# Altium PCB Slave_CA.PcbDoc
Units mil, origin at the board's own origin, x right, y up, seen from the top; angles counter-clockwise.
Board outline 2480.03 x 2575.03 mil, 2 copper layers (Top Layer, Bottom Layer); 31 components, 19 nets, 108 pads, 3 vias.
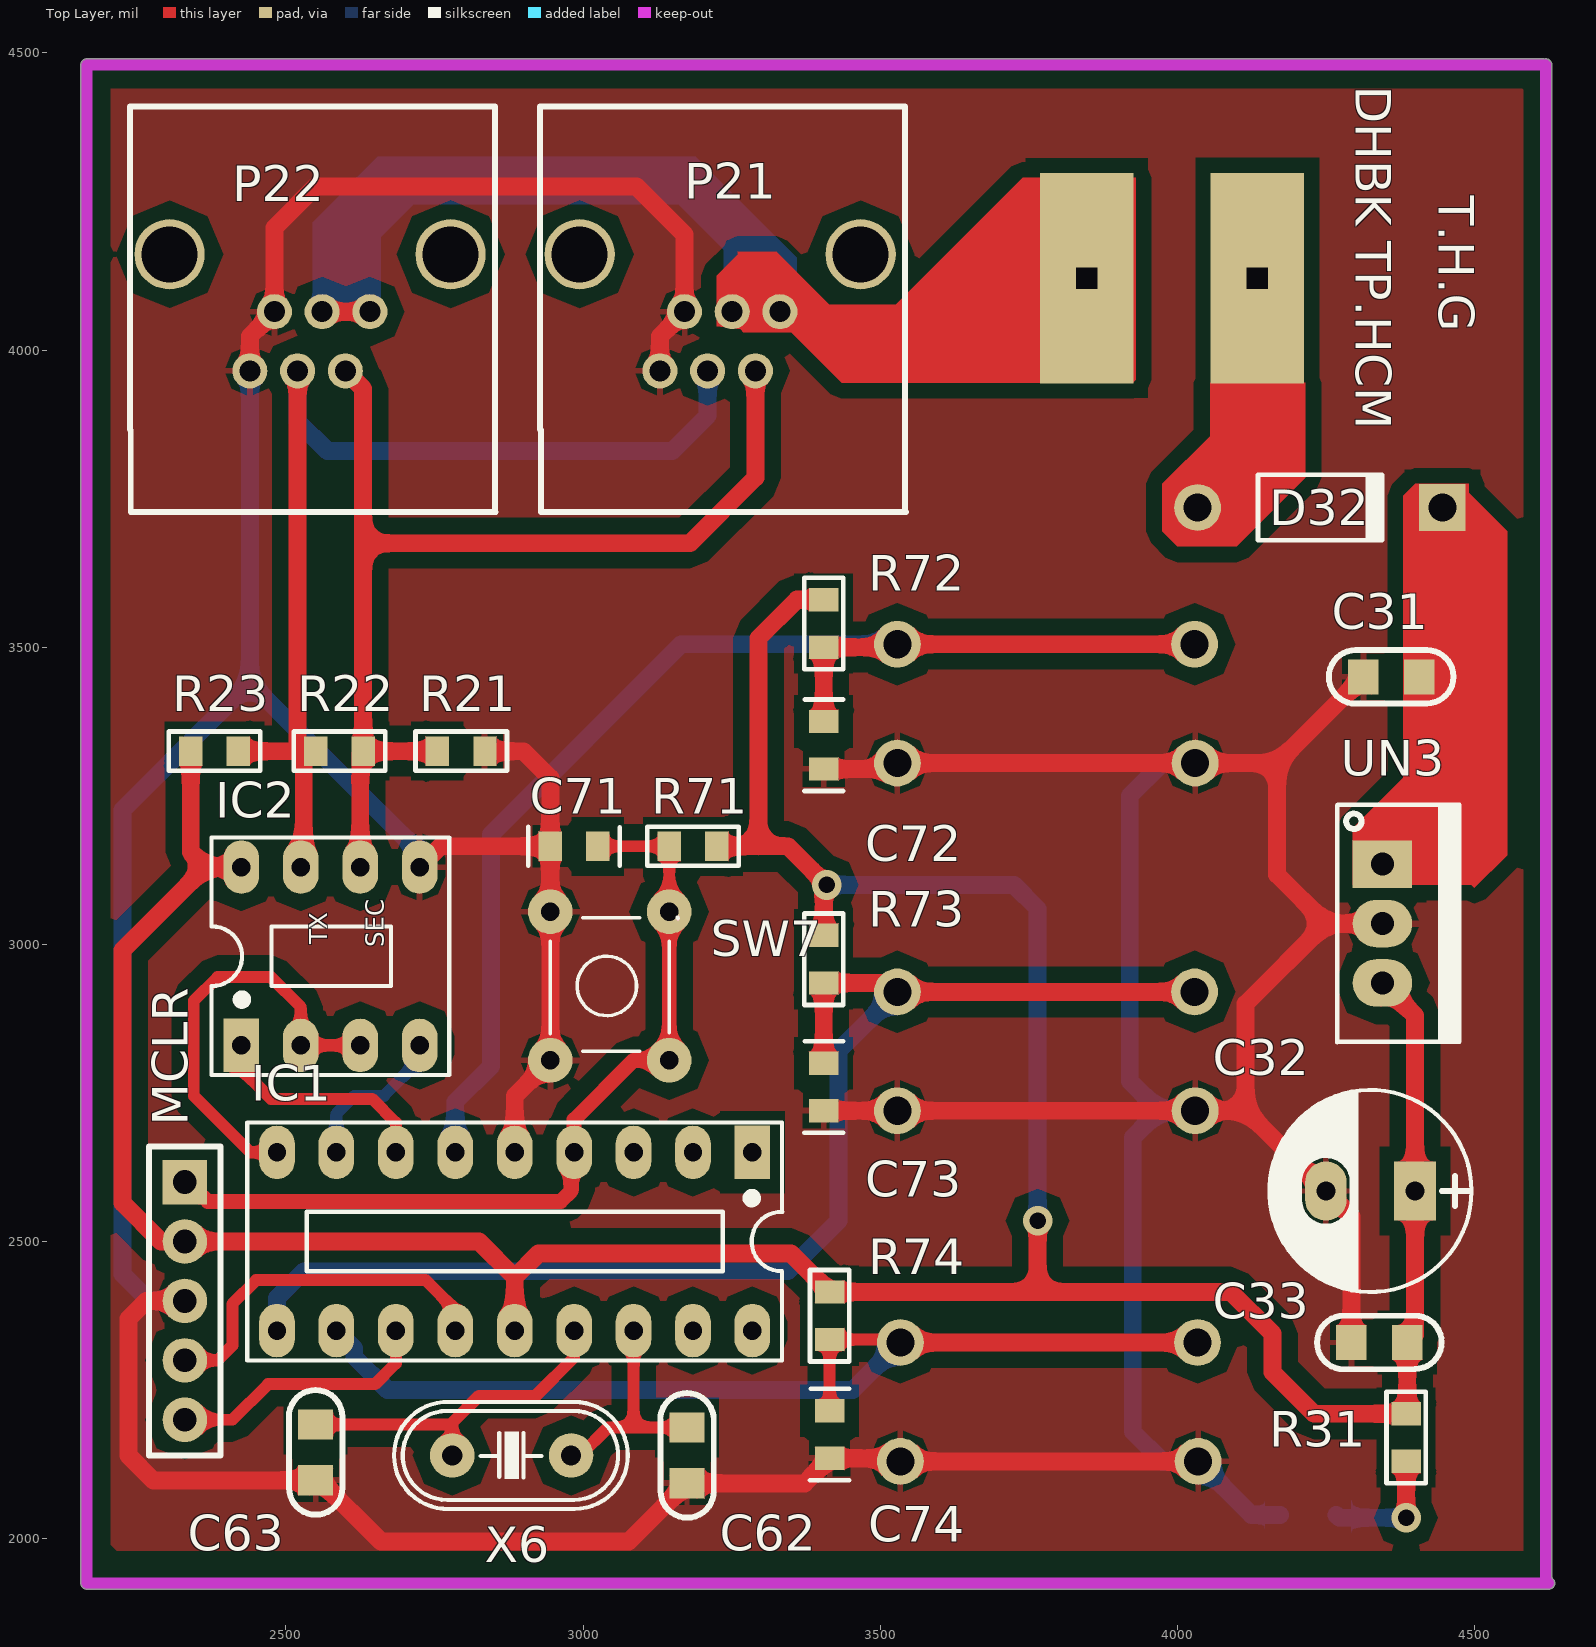
[diagram p0: Top Layer view]
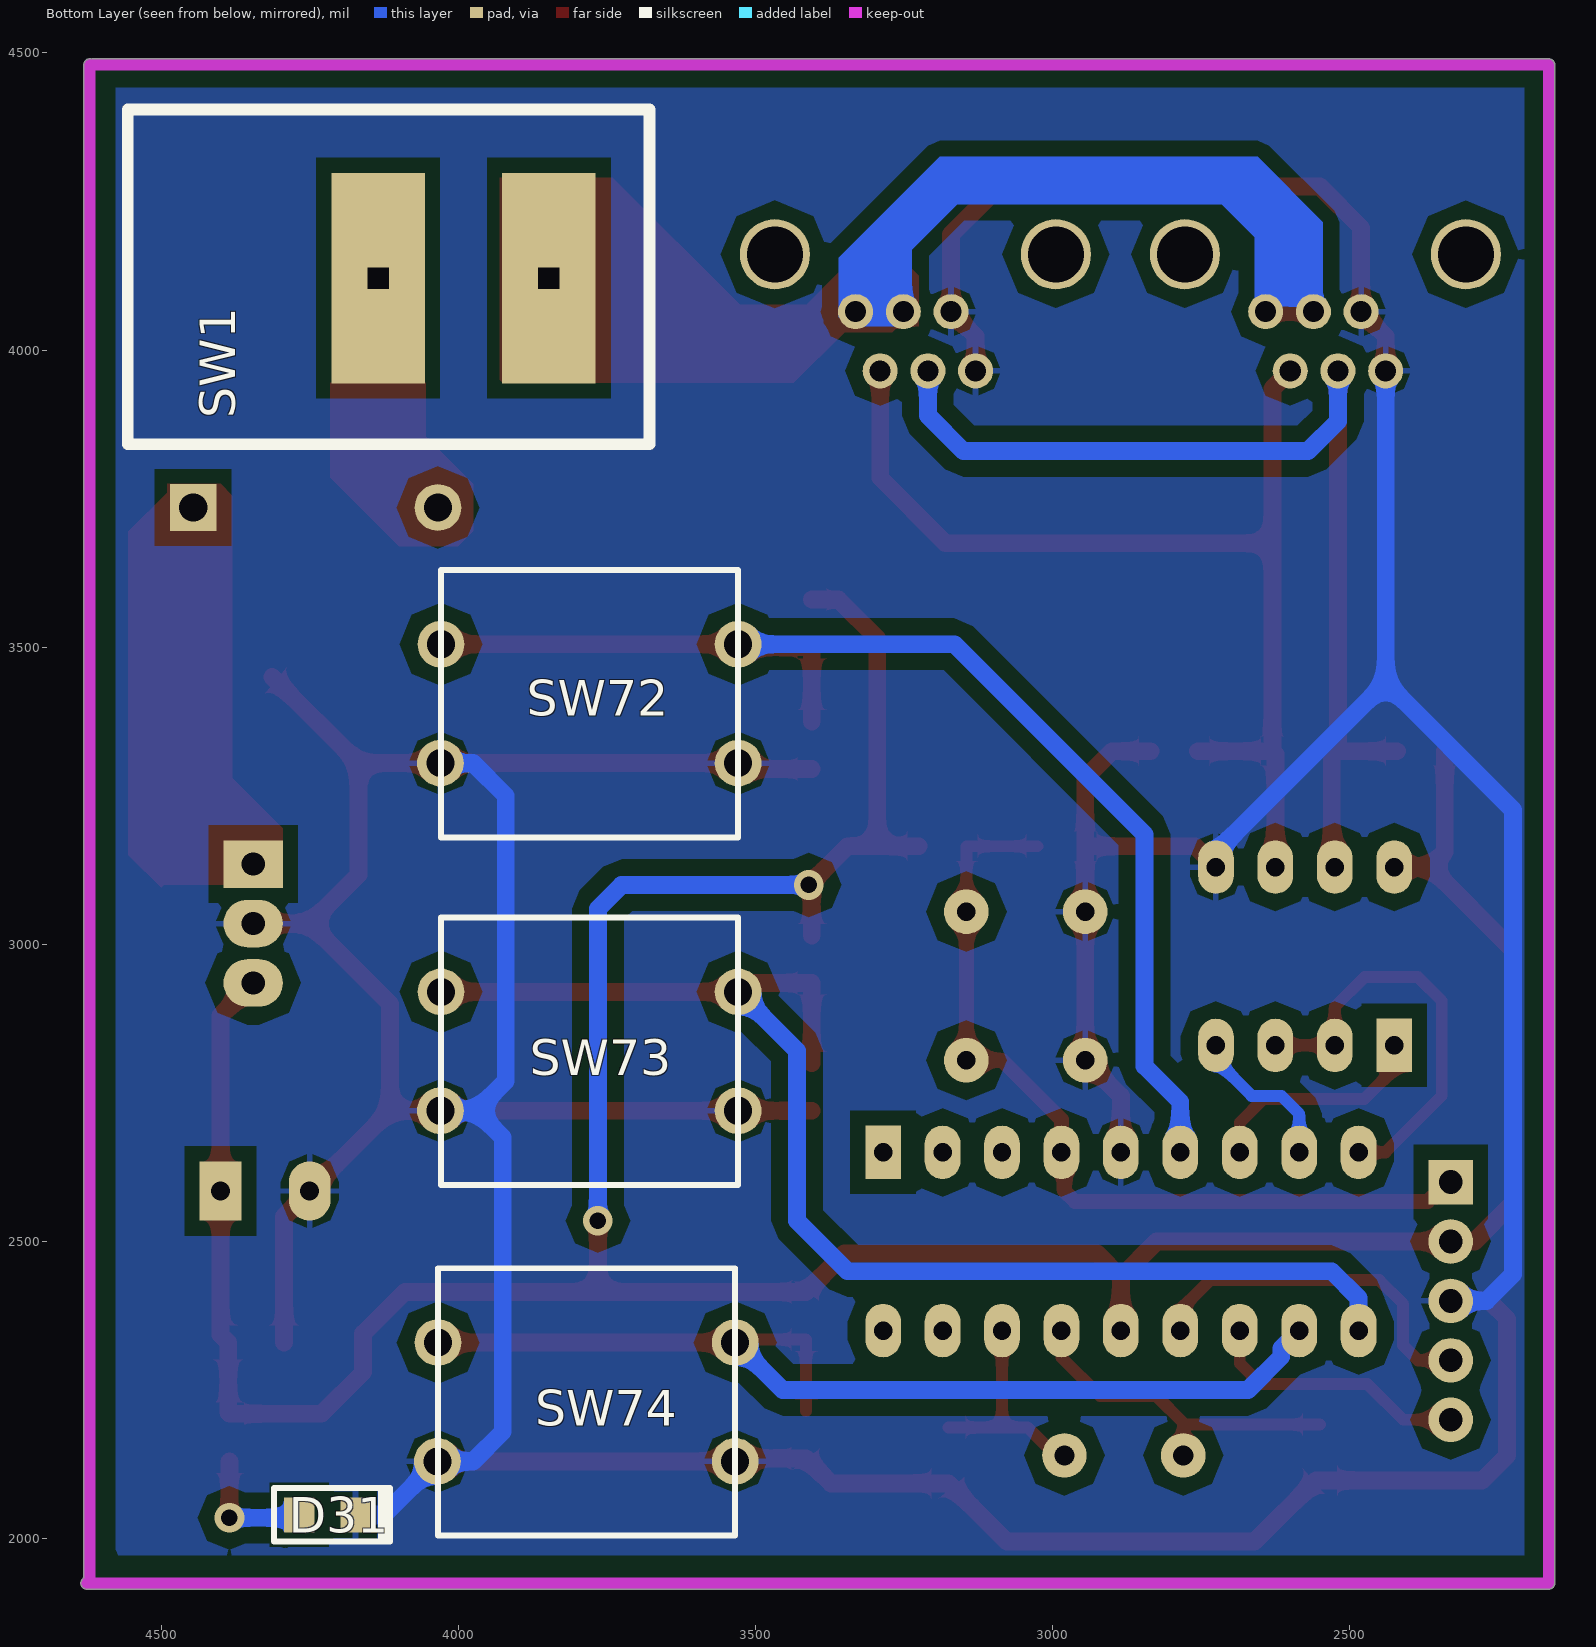
[diagram p1: Bottom Layer view, seen from below]
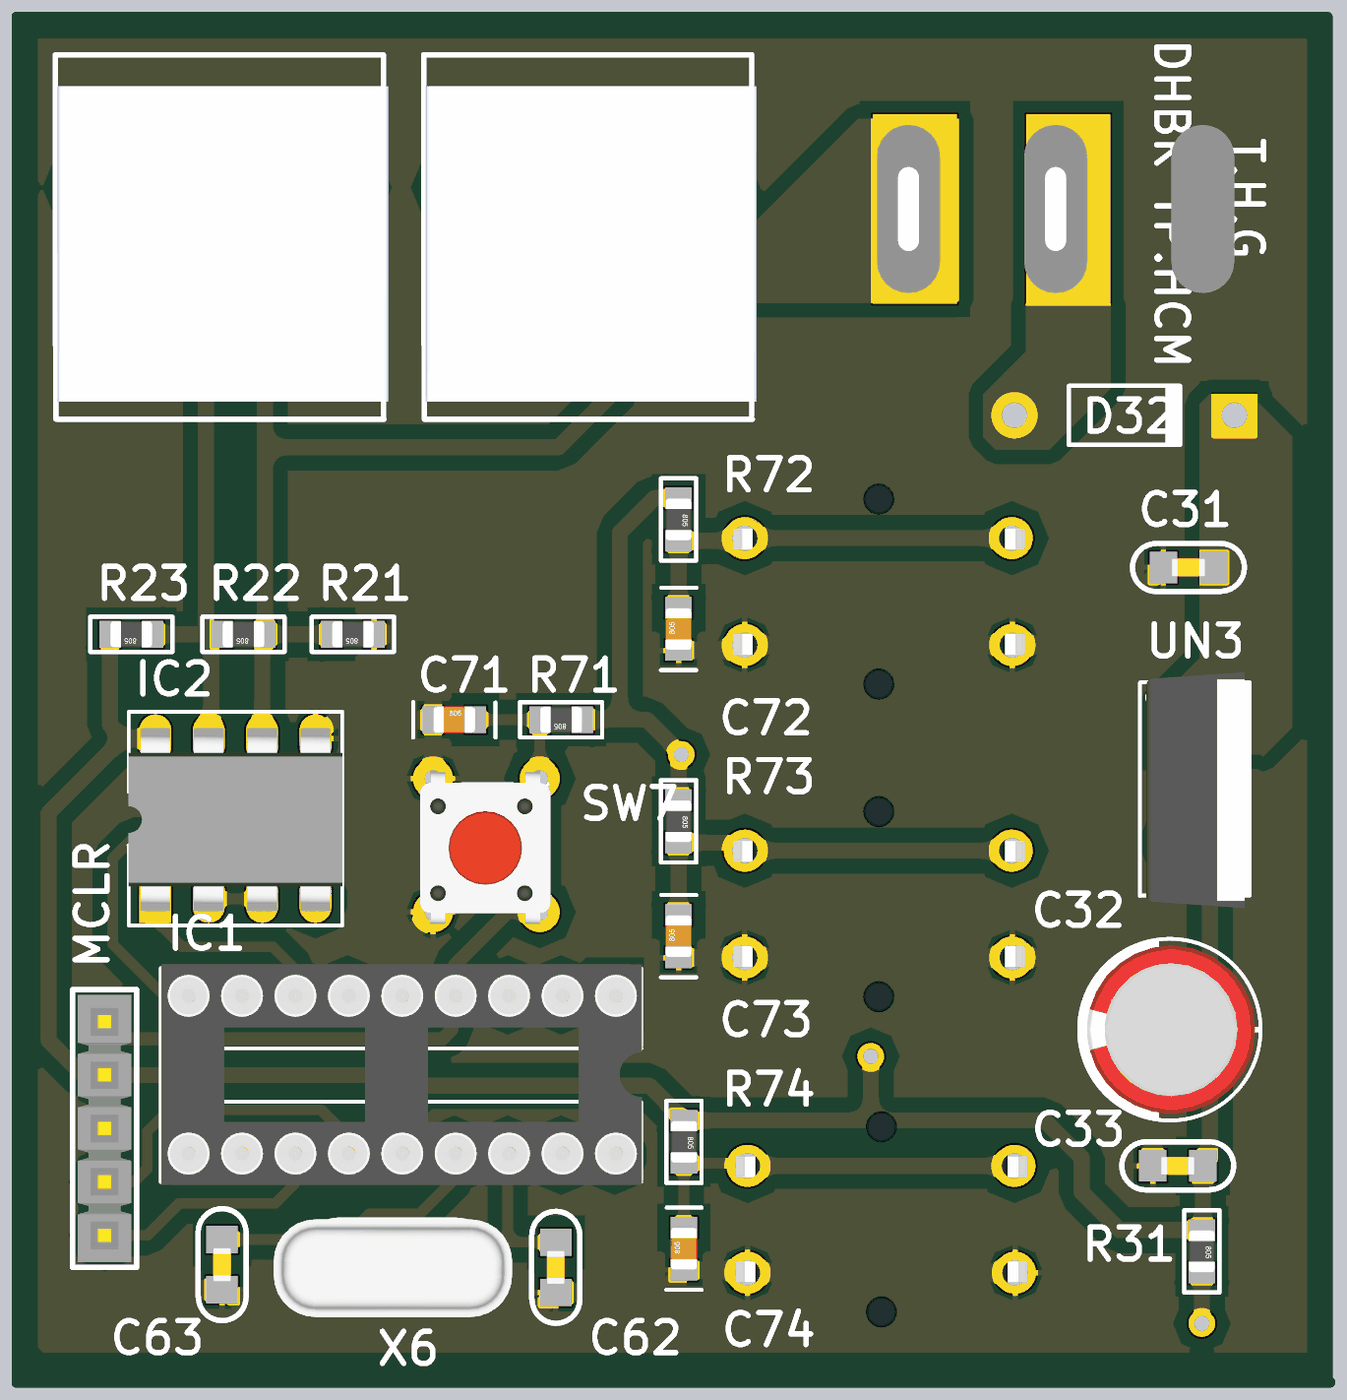
[diagram p2: 3D render of the assembled board from above, using the file's embedded part models]
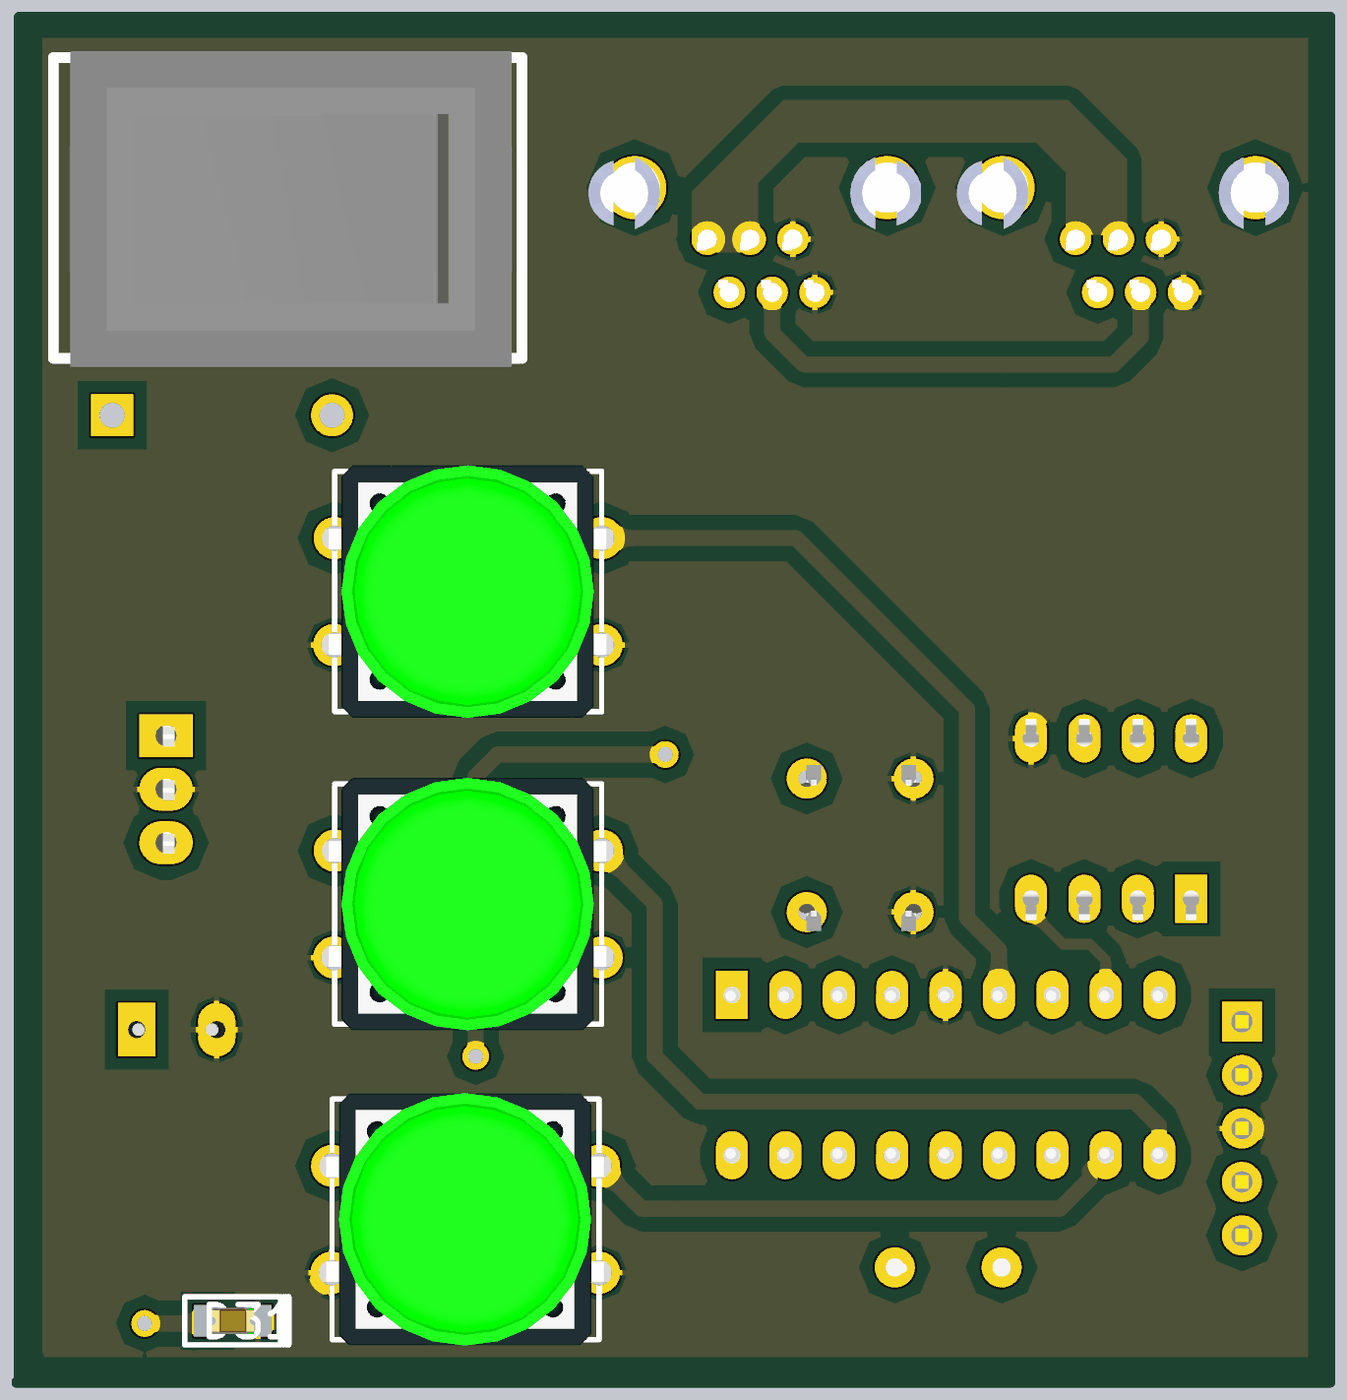
[diagram p3: 3D render of the assembled board from below, using the file's embedded part models]

## Layer stack, top to bottom
Top Solder: solder mask 0.4, Solder Resist, Dk 3.5
Top Layer: signal copper 1.4
Dielectric 1: dielectric 12.6, FR-4, Dk 4.8
Bottom Layer: signal copper 1.4
Bottom Solder: solder mask 0.4, Solder Resist, Dk 3.5

## Board outline
2154.99,1925 ccw(c2165,1925) 2165,1914.98 4625,1914.98 ccw(c4625,1925) 4635.02,1925 ccw(c4625,1925) 4632.08,1932.08 4630.02,1934.15 4630.02,4480 ccw(c4620,4480) 4617.5,4489.7 ccw(c4615,4480) 4615,4490.02 2165,4490.02 ccw(c2165,4480) 2154.99,4480

## Design rules (kind name [scope] priority, off if disabled: settings)
Clearance [All] p1: gap=25
PolygonConnect [All] p1: connectstyle=Relief reliefconductorwidth=10 reliefentries=4 polygonreliefangle="90 Angle" airgapwidth=10
RoutingVias [All] p1: holewidth=28 width=50 viastyle="Through Hole" minholewidth=28 minwidth=50 maxholewidth=28 maxwidth=50
SolderMaskExpansion [All] p1: expansion=4
Width [All] p1: maxlimit=80 minlimit=15 preferedwidth=20
30 further rules are at their usual default settings.

## Components (designator, comment, footprint, x,y, rotation, side; value= is the part's Value field where it differs from the comment)
C31 "Cap Non-pol" C-NP-0805 4360,3450 r0 top
C32 "100uF/16V" CP1.5/3.4 4400,2585 r180 top
C33 "Cap Non-pol" C-NP-0805 4340,2330 r0 top
C62 "Cap Non-pol" C-NP-0805 3175,2140 r270 top
C63 "Cap Non-pol" C-NP-0805 2550,2145 r270 top
C71 "Capacitor Ceramic" CAP_SMD_0805 2985,3165 r0 top
C72 "Capacitor Ceramic" CAP_SMD_0805 3405,3335 r90 top
C73 "Capacitor Ceramic" CAP_SMD_0805 3405,2760 r90 top
C74 "Capacitor Ceramic" CAP_SMD_0805 3415,2175 r90 top
D31 "LED" "LED-0805 RED" 4220,2040 r180 bottom
D32 "Diode 1N4007" DO-41 4240,3735 r0 top
IC1 "PIC16F628A" DIP18/W0.3 3285,2650 r180 top
IC2 "MAX485" DIP8/W0.3 2425,2830 r0 top
MCLR "Header 5" "Header 5" 2330,2600 r270 top (schematic designator P4)
P21 "Header 8" RJ11 3290,3965 r180 top
P22 "Header 8" RJ11 2600,3965 r180 top
R21 "RES_SMD_0805" "DIEN TRO 0805" 2795,3325 r0 top
R22 "RES_SMD_0805" "DIEN TRO 0805" 2590,3325 r0 top
R23 "RES_SMD_0805" "DIEN TRO 0805" 2380,3325 r0 top
R31 "RES_SMD_0805" "DIEN TRO 0805" 4385,2170 r90 top
R71 "RES_SMD_0805" "DIEN TRO 0805" 3185,3165 r0 top
R72 "RES_SMD_0805" "DIEN TRO 0805" 3405,3540 r90 top
R73 "RES_SMD_0805" "DIEN TRO 0805" 3405,2975 r90 top
R74 "RES_SMD_0805" "DIEN TRO 0805" 3415,2375 r90 top
SW1 "SW_BapBenh" SW_Bapbenh 3875,4125 r90 bottom
SW7 "SW7" SW4 2945,2805 r90 top
SW72 "SW-4P-B" SW-4P-B 3780,3405 r0 bottom
SW73 "SW-4P-B" SW-4P-B 3780,2820 r0 bottom
SW74 "SW-4P-B" SW-4P-B 3785,2230 r0 bottom
UN3 "L78M05CP" QTO-220 4345,3135 r270 top
X6 "20Mhz" XT2 2880,2140 r0 top

## Footprints (in the part's own frame and the unit in brackets; to place one, negate y for a bottom-side part, rotate by r counter-clockwise, add the part's x,y. Pads: shape width x height; smd on the part's side, far side on the other; paste and mask are expansions set on the pad)
C-NP-0805 [mm] "Chip Capacitor; Non-polarized; Body 2.0 x 1.3 mm (LxW typ) [2012]"
  rect 1.3x1.5 smd: 1(-1.194,0) 2(1.194,0)
  silkscreen extent -2.67,-1.14 2.66,1.14, body extent -0.8,-0.43 0.8,0.43, height 0.79
CAP_SMD_0805 [mil] "Chip Resistor; Body 2.0 x 1.3 mm (LxW typ)"
  rect 39.37x50 smd: 1(-40,0) 2(40,0)
  silkscreen extent -77,-33 77,33, body extent -39,-25 39,25, height 31
CP1.5/3.4 [mil] "Tu hoa 220->470uF,16V, 470uF/16V,25V"
  rect 70x100 hole 32: 1(0,0)
  oval 70x100 hole 32: 2(150,0)
  silkscreen extent -95,-170 245,170, body extent -85,-157 230,157, height 446
"DIEN TRO 0805" [mil] "Chip Resistor; Body 2.0 x 1.3 mm (LxW typ)"
  rect 39.37x50 smd: 1(-40,0) 2(40,0)
  silkscreen extent -77,-33 77,33, body extent -39,-25 39,25, height 31
DIP8/W0.3 [mil] "8 PIN, W 300mil, Pin to pin 100mil"
  rect 60x90 hole 31: 1(0,0)
  oval 60x90 hole 31: 2(100,0) 3(200,0) 4(300,0) 5(300,300) 6(200,300) 7(100,300) 8(0,300)
  silkscreen extent -50,-50 350,350, body extent -50,-40 350,336, height 201
DIP18/W0.3 [mil] "18 PIN, W 300mil, Pin to pin 100mil"
  rect 60x90 hole 31: 1(0,0)
  oval 60x90 hole 31: 2(100,0) 3(200,0) 4(300,0) 5(400,0) 6(500,0) 7(600,0) 8(700,0) 9(800,0) 10(800,300) 11(700,300) 12(600,300) 13(500,300) 14(400,300) 15(300,300) 16(200,300) 17(100,300) 18(0,300)
  silkscreen extent -50,-50 850,350, body extent -51,-57 849,356, height 119
DO-41 [mm] "Diode, Axial; Body 5.2 x 2.7 mm (LxDia. max), Lead Dia. 0.86 mm (max)"
  round 2 hole 1.2: 1(-5.23,0)
  rect 2x2 hole 1.2: 2(5.23,0)
  silkscreen extent -2.65,-1.4 2.75,1.4
"Header 5" [mil] "Connector; Header; 5 Position; Solder Pad 35mil"
  rect 75x75 hole 40: 1(0,0)
  round 75 hole 40: 2(100,0) 3(200,0) 4(300,0) 5(400,0)
  silkscreen extent -60,-60 460,60, body extent -50,-50 450,50, height 83
"LED-0805 RED" [mm] "Chip LED; RED; Body 2.0 x 1.3 mm (LxW typ) [2012]"
  rect 1.3x1.5 smd: 1(-1.204,0) 2(1.204,0)
  silkscreen extent -2.29,-1.14 2.67,1.14, body extent -1.01,-0.63 1.01,0.62, height 1.1
QTO-220 [mil] "TO-220 - 1-2-3"
  rect 80x100 hole 39: 1(0,0)
  oval 80x100 hole 39: 2(100,0) 3(200,0)
  silkscreen extent -100,-76 300,130, body extent -119,-64 322,121, height 755
RJ11 [mm] "DIP 20, 20 PIN, W 300mil, Pin to pin 100mil"
  round 1.5 hole 0.9: 1(0,0) 2(2.04,0) 3(4.08,0) 4(-1.05,-2.53) 5(0.99,-2.53) 6(3.03,-2.53)
  round 3 hole 2.4: 7(-4.5,-4.98) 8(7.51,-4.98)
  silkscreen extent -6.43,-11.3 9.2,6.03, body extent -6.71,-9.8 9.11,5.19, height 12.87
SW4 [mil] "SW button 4pin, 250 x250 mil"
  round 75 hole 31: 1(0,0) 2(250,-200) 3(250,0) 4(0,-200)
  silkscreen extent 15,-215 240,0, body extent -36,-220 276,24, height 276
SW-4P-B [mm] "Nut bam lon"
  round 2 hole 1.2: 1(-6.375,2.54) 2(-6.375,-2.54) 3(6.325,-2.54) 4(6.35,2.54)
  silkscreen extent -6.38,-5.71 6.32,5.71, body extent -6.94,-6 6.94,6, height 9.5
SW_Bapbenh [mm] "Typical LED; GREEN; RED; 2 Leads; Solder Pad 35mil"
  rect 9x4 hole 0.9 square: 1(-0.1,-0.7) 2(-0.1,6.6)
  silkscreen extent -7.2,-5 7.1,17.3, body extent -7.6,-4.55 7.4,16.55, height 16.72
XT2 [mil] "Footpin for Crystal 2 pin"
  round 75 hole 34: 1(-100,0) 2(100,0)
  silkscreen extent -198,-90 195,90, body extent -233,-93 213,90, height 138

## Part data
C31 C33 C62 C63: "Non-polarized Capacitor"
C32: library part CP3, "Cap 100uF/35V - 470uF/16V"
C71 C72 C73 C74: library part CapSMD, "Capacitor"
D31: "Typical LED"
D32: "1 Amp General Purpose Rectifier"
IC2: "RS232 - RS485 (Same sn75176)"
MCLR: "Header, 5-Pin"
P21 P22: "Header, 8-Pin"
R21 R22 R23 R31 R71 R72 R73 R74: "RES_0805"
SW7: library part SW4, "Switch button 4 pin"
SW72 SW73 SW74: library part SW-4PIN-BIG, "Switch Big 4 Pin"
UN3: "Positive Voltage Regulator"
X6: library part XT2, "Crystal For all Crystal 2pin."

## Via types
v1: diameter 50, hole 28, Top Layer to Bottom Layer, 3 vias

## Nets (pads, with @x,y where several pads share a name; then routed paths per layer and width w, separated by ;. In a path a pad name is that pad's centre, name@x,y a point inside that pad or via, vN(x,y) a via of type N, cw(c..) or ccw(c..) an arc to the next point about the centre after c; other vN are vias at no path point)
12V: P21.4 P21.5 P22.4 P22.5 SW1.1 | length 1730.9
  Top Layer w30: P22.5 P22.4 ; P21.5 P21.4 3331.34,4062.01 3788.39,4062.01 SW1.1
  Bottom Layer w30: P22.5 2561.02,4196.02 2645,4280 3175,4280 3251.02,4203.98 P21.5
A: IC2.6 P21.1 P22.1 R21.1 R22.2 | length 1853
  Top Layer w30: P22.1 2630,3935 2630,3675 ; IC2.6 R22.2@2625,3320 ; R21.1 R22.2 2630,3675 ; P21.1 3290,3785 3180,3675 2630,3675
B: IC2.7 P21.2 P22.2 R22.1 R23.2 | length 1819.8
  Top Layer w30: R23.2 2530,3325 ; P22.2 2519.68,3335.32 2530,3325 ; IC2.7@2530,3155 2530,3325
  Bottom Layer w30: P22.2 2519.68,3880.32 2570,3830 3150,3830 3209.68,3889.68 P21.2
BUTTON1: C72.2 IC1.6 R72.1 SW72.2 SW72.3 | length 2127.5
  Top Layer w30: C72.2 R72.1 3524,3500 SW72.2 SW72.3
  Bottom Layer w30: IC1.6 2785,2735 2845,2795 2845,3185 3165,3505 SW72.2
BUTTON2: C73.2 IC1.10 R73.1 SW73.2 SW73.3 | length 2245.1
  Top Layer w30: C73.2 R73.1 3514,2935 SW73.2 SW73.3
  Bottom Layer w30: IC1.10 2485,2405 2530,2450 3345,2450 3430,2535 3430,2821 SW73.2
BUTTON3: C74.2 IC1.11 R74.1 SW74.2 SW74.3 | length 1772.8
  Top Layer w20: C74.2 R74.1 3529,2335 SW74.2
  Top Layer w30: SW74.2 SW74.3
  Bottom Layer w30: IC1.11 2615,2320 2615,2306.01 2671.01,2250 3454,2250 SW74.2
GND: C31.1 C32.2 C33.1 C62.2 C63.2 C71.1 C72.1 C73.1 C74.1 D31.2 IC1.5 IC2.5 MCLR.3 P21.3 P21.6 P22.3 P22.6 R21.2 SW7.1 SW7.3 SW72.1 SW72.4 SW73.1 SW73.4 SW74.1 SW74.4 UN3.2 | length 11216.8
  Top Layer w30: MCLR.3 2265,2400 2235,2370 2235,2140 2277,2098 C63.2 2557,2098 2660,1995 3077,1995 C62.2 3373,2093 C74.1 3529,2135 SW74.1 SW74.4 ; P22.3 2439.37,4023.27 P22.6 2480.71,4205.71 2550,4275 3090,4275 3170.71,4194.29 P21.6 3129.37,4023.27 P21.3 ; IC2.5 2760,3165 C71.1 ; R21.2 2900,3325 2945,3280 C71.1 ; IC1.5 2885,2745 SW7.1 SW7.3 C71.1 ; C73.1 SW73.1 SW73.4 4115,2720 ; C72.1 3519,3295 SW72.1 SW72.4 4168,3305 ; C33.1 4293,2542 C32.2 4115,2720 ; C31.1 4168,3305 ; UN3.2 4250,3035 ; 4115,2720 4115,2900 4250,3035 ; 4168,3305 4168,3117 4250,3035
  Bottom Layer w30: MCLR.3 2270,2400 2225,2445 2225,3226.26 2439.37,3440.63 ; P22.3 2439.37,3440.63 ; IC2.5 2725,3155 2439.37,3440.63 ; SW73.4 3970,2720 ; SW72.4 3975,3305 3920,3250 3920,2770 3970,2720 ; D31.2 4125,2040 SW74.4 3975,2130 3925,2180 3925,2675 3970,2720
MCLR: C71.2 IC1.4 MCLR.1 R71.1 SW7.2 SW7.4 | length 1474.2
  Top Layer w20: C71.2 R71.1 SW7.2
  Top Layer w25: MCLR.1 2355,2575 2361.07,2575 2368.57,2567.5 2962.5,2567.5 2980,2585 2980,2645 IC1.4 2985,2705 3085,2805 SW7.4 SW7.2
NetC31_2: C31.2 D32.2 UN3.1 | length 641.8
  Top Layer w30: UN3.1 4407,3197 C31.2 4445.91,3488.91 D32.2
NetD31_1: D31.1 R31.1 | length 214.7
  Top Layer w30: v1(4385,2035) R31.1
  Bottom Layer w30: D31.1 4272.4,2035 v1(4385,2035)
NetD32_1: D32.1 SW1.2 | length 427.8
  Top Layer w30: D32.1 4134.84,3835.75 SW1.2
PGC: IC1.12 MCLR.5 | length 449.4
  Top Layer w20: MCLR.5 2410,2200 2470,2260 2650,2260 2685,2295 IC1.12
PGD: IC1.13 MCLR.4 | length 607.6
  Top Layer w20: MCLR.4 2385,2300 2410,2325 2410,2395 2450,2435 2735,2435 2785,2385 IC1.13
RXD: IC1.7 IC2.1 | length 387.3
  Top Layer w20: IC2.1 2425,2790 2475,2740 2645,2740 2685,2700 IC1.7
SEC: IC1.9 IC2.2 IC2.3 | length 721.6
  Top Layer w20: IC1.9 2440,2650 2345,2745 2345,2905 2385,2945 2475,2945 2525,2895 IC2.2 IC2.3
TXD: IC1.8 IC2.4 | length 267.3
  Bottom Layer w20: IC1.8 2585,2715 2615,2745 2665,2745 2725,2805 IC2.4
VCC: C32.1 C33.2 IC1.14 IC2.8 MCLR.2 R23.1 R31.2 R71.2 R72.2 R73.2 R74.2 UN3.3 | length 5903.9
  Top Layer w30: R23.1 2340,3155 2365,3130 ; IC2.8 2365,3130 ; IC1.14 2885,2440 ; R71.2 3295,3165 ; R73.2 v1@3405,3100 ; v1@3405,3105 3345,3165 3295,3165 ; R72.2 3360,3580 3295,3515 3295,3165 ; v1(3765,2535) 3765,2415 ; UN3.3 4400,2880 C32.1 4400,2343 C33.2 4387,2212 R31.2 4230,2210 4160,2280 4160,2345 4090,2415 3765,2415 ; 2365,3130 2225,2990 2225,2565 2290,2500 MCLR.2 2825,2500 2885,2440 ; 2885,2440 2925,2480 3350,2480 R74.2 3765,2415
  Bottom Layer w30: v1(3410,3100) 3725,3100 3765,3060 v1(3765,2535)
XT1: C62.1 IC1.16 X6.2 | length 377.5
  Top Layer w20: X6.2 2995,2140 3042,2187 3085,2187 ; IC1.16 3085,2187 ; C62.1 3085,2187
XT2: C63.1 IC1.15 X6.1 | length 632.6
  Top Layer w20: C63.1 2780,2192 X6.1 2780,2195 2825,2240 2920,2240 2985,2305 IC1.15
pads on no net: IC1.1 IC1.2 IC1.3 IC1.17 IC1.18 P21.7 P21.8 P22.7 P22.8

## Polygon pours and split planes (outlines as drawn)
GND on Bottom Layer "G2" (solid, remove dead copper, pour order 0): 2206.3,4441.77 2206.3,1971.77 4576.3,1971.77 4581.3,1976.77 4576.3,1981.77 4576.3,4441.77
GND on Top Layer "G2" (solid, remove dead copper, pour order 2): 2205,4440 2205,1990 2215,1980 4590,1980 4590,4430 4580,4440

## Keep-outs
Keep-Out Layer:
  lines w20: 4615,4480 2165,4480 2165,1925 4625,1925 4620,1930 4620,4480

## Other copper
Top Layer:
  region net NetC31_2: 4490,3775 4490,3760 4555,3695 4555,3150 4500,3095 4495,3100 4295,3100 4295,3195 4380,3280 4380,3755 4400,3775
  region net NetD32_1: 4055,3945 4055,3855 3975,3775 3975,3695 4000,3670 4100,3670 4215,3785 4215,3945
  region net 12V: 3265,4035 3270,4030 3350,4030 3435,3945 3925,3945 3930,3950 3930,4290 3740,4290 3525,4075 3415,4075 3325,4165 3260,4165 3260,4160 3225,4125 3225,4040
Bottom Layer:
  region net 12V: 2545,4070 2545,4215 2655,4325 3190,4325 3360,4155 3360,4055 3325,4040 3305,4040 3240,4040 3240,4165 3160,4245 2715,4245 2660,4190 2660,4075

## Silkscreen, mask and mechanical layers (free items; w line width, h text height)
Top Overlay:
  text "DHBK TP.HCM" at 4300,4445 h60 r270
  text "T.H.G" at 4440,4260 h60 r270
  text "TX" at 2570,3000 h30 r90
  text "SEC" at 2665,2995 h30 r90